# EAGLE board SPI3_projet (EAGLE 7.6.0)

Size 73.58 x 63.39 mm. Coordinates in mm from the lower left corner, seen from the top.
Outline: 0,0 56.82,0 56.82,53.33 0,53.33 0,0
Copper layers (1*16): Top 0.035mm / dielectric 1.5mm / Bottom 0.035mm
Design rules "default": minimum track width 10mil, minimum drill 24mil, track to track 8mil, track to pad 8mil, pad to pad 8mil, via to via 8mil, smd to smd 8mil, copper to edge 40mil, drill to drill 8mil, minimum pad ring 10mil, minimum via ring 8mil, stop-mask expansion 4mil, vias tented up to drill 0mil, thermal gap 10mil

## Footprints (pad centres in the part's own frame; a part is rotated, then mirrored left to right if it is on the bottom)
CR2032H = drill 1.118 pad 2.54 octagon: + 5.08,10.795; +@1 -5.08,10.795; - 0,-6.985
LED5MM = drill 0.813 octagon: A -1.27,0; K 1.27,0
2P-2.54-65/35MIL = drill 0.889 pad 1.651 square: 1 0,1.27 | drill 0.889 pad 1.651: 2 0,-1.27
PIEZO-22MM = drill 1 pad 2.54: P$1 -5,0; P$2 5,0
0207/10 = drill 0.813 octagon: 1 -5.08,0; 2 5.08,0
PHOTORESISTOR-2.54 = drill 1 pad 1.5: P$1 -1.27,0; P$2 1.27,0
B25V = drill 0.813 long: A 2.54,0.635; E -2.54,0.635; S 0,0.635
TL1105 = drill 1 pad 1.676: 1 -2.25,3.25; 2 2.25,3.25; 3 -2.25,-3.25; 4 2.25,-3.25
ARDUINO_UNO = drill 1.016 pad 1.88: 0 63.5,50.8; 1 60.96,50.8; 2 58.42,50.8; 3 55.88,50.8; 3.3V 35.56,2.54; 4 53.34,50.8; 5 50.8,50.8; 5V 38.1,2.54; 6 48.26,50.8; 7 45.72,50.8; 8 41.656,50.8; 9 39.116,50.8; 10 36.576,50.8; 11 34.036,50.8; 12 31.496,50.8; 13 28.956,50.8; A0 50.8,2.54; A1 53.34,2.54; A2 55.88,2.54; A3 58.42,2.54; A4 60.96,2.54; A5 63.5,2.54; AREF 23.876,50.8; GND 26.416,50.8; GND. 43.18,2.54; GND.. 40.64,2.54; I/OREF 30.48,2.54; N/C 27.94,2.54; RESET 33.02,2.54; SCL 18.796,50.8; SDA 21.336,50.8; VIN 45.72,2.54 | hole 3.2: 66.04,7.62; 66.04,35.56; 15.24,50.8; 13.97,2.54
DIL16 = drill 0.813 long: 1 -8.89,-3.81; 2 -6.35,-3.81; 3 -3.81,-3.81; 4 -1.27,-3.81; 5 1.27,-3.81; 6 3.81,-3.81; 7 6.35,-3.81; 8 8.89,-3.81; 9 8.89,3.81; 10 6.35,3.81; 11 3.81,3.81; 12 1.27,3.81; 13 -1.27,3.81; 14 -3.81,3.81; 15 -6.35,3.81; 16 -8.89,3.81
1X16P-2.54-2.54-11.6-3.0-BLACK-MALE = drill 0.889 pad 1.651 square: 1 0,19.05 | drill 0.889 pad 1.651: 2 0,16.51; 3 0,13.97; 4 0,11.43; 5 0,8.89; 6 0,6.35; 7 0,3.81; 8 0,1.27; 9 0,-1.27; 10 0,-3.81; 11 0,-6.35; 12 0,-8.89; 13 0,-11.43; 14 0,-13.97; 15 0,-16.51; 16 0,-19.05

## Placement (x,y rotation side)
BAT1  [CR2032H]  5,302.18 0 top  (outside the outline)
D1  [LED5MM]  5,111.68 0 top  (outside the outline)
D2  [LED5MM]  5,137.08 0 top  (outside the outline)
D3  [LED5MM]  5,149.78 0 top  (outside the outline)
D4  [LED5MM]  5,124.38 0 top  (outside the outline)
M1  [2P-2.54-65/35MIL]  5,35.48 0 top
P1  5V  [2P-2.54-65/35MIL]  5,238.68 0 top  (outside the outline)
PIEZO1  [PIEZO-22MM]  5,162.48 0 top  (outside the outline)
R1  1k‎Ω  [0207/10]  5,251.38 0 top  (outside the outline)
R2  [PHOTORESISTOR-2.54]  5,22.78 0 top
R3  [PHOTORESISTOR-2.54]  5,213.28 0 top  (outside the outline)
R4  220‎Ω  [0207/10]  5,48.18 0 top
R5  220‎Ω  [0207/10]  5,60.88 0 top
R6  220‎Ω  [0207/10]  5,73.58 0 top  (outside the outline)
R7  1k‎Ω  [0207/10]  5,187.88 0 top  (outside the outline)
R8  1k‎Ω  [0207/10]  5,200.58 0 top  (outside the outline)
R9  2k‎Ω  [0207/10]  5,225.98 0 top  (outside the outline)
R10  1k‎Ω  [0207/10]  5,264.08 0 top  (outside the outline)
R11  1k‎Ω  [0207/10]  5,289.48 0 top  (outside the outline)
Rpot1  250k‎Ω  [B25V]  5,86.28 0 top  (outside the outline)
S1  [TL1105]  5,276.78 0 top  (outside the outline)
U1  [ARDUINO_UNO]  5,10.08 0 top
U2  [DIL16]  5,98.98 0 top  (outside the outline)
U3  [1X16P-2.54-2.54-11.6-3.0-BLACK-MALE]  5,175.18 0 top  (outside the outline)

## Library data of the parts
BAT1 D1-D4 M1 P1 PIEZO1 R1-R11 Rpot1 S1 U1-U3 = AUTODESK_CIRCUITS_BREADBOARD

## Nets
N$1: R4.2 U1.4
N$2: D3.A R4.1
N$3: R5.2 U1.3
N$4: R6.2 U1.2
N$5: D4.A R6.1
N$6: Rpot1.S U1.A0
N$7: S1.2
N$8: S1.1
N$9: S1.3 U1.13
N$10: D2.A R5.1
N$11: PIEZO1.P$2 U1.6
N$12: R9.1 U3.3
N$13: U1.7 U3.4
N$14: U1.8 U3.6
N$15: U3.9
N$16: U3.10
N$17: U1.9 U3.11
N$18: U1.10 U3.12
N$19: U1.11 U3.13
N$20: U3.7
N$21: U3.8
N$22: U1.12 U3.14
N$23: R3.P$2 R7.2 U1.A1
N$24: R2.P$2 R8.2 U1.A2
N$25: D2.K D3.K D4.K P1.1 PIEZO1.P$1 R7.1 R8.1 R9.2 Rpot1.A U1.GND U2.10 U2.13 U3.1 U3.5 U3.16
N$26: R10.1 U2.9
N$27: R1.1 U3.15
N$28: U1.5
N$29: U2.1
N$30: U2.2
N$31: U2.3
N$32: U2.4
N$33: U2.5
N$34: U2.6
N$35: U2.7
N$36: P1.2 R11.1 U2.8
N$37: M1.1 U2.11
N$38: U2.12
N$39: M1.2 U2.14
N$40: R1.2 R2.P$1 R3.P$1 R10.2 Rpot1.E S1.4 U1.5V U2.15 U2.16 U3.2
N$41: R11.2
N$42: BAT1.+ BAT1.+@1 D1.A
N$43: BAT1.- D1.K

## Tracks (layer width: path | path; a pad name or v marks a point on that pad's centre or on a via)
N$1  (1 unrouted)
N$2  (1 unrouted)
N$3  (1 unrouted)
N$4  (1 unrouted)
N$5  (1 unrouted)
N$6  (1 unrouted)
N$9  (1 unrouted)
N$10  (1 unrouted)
N$11  (1 unrouted)
N$12  (1 unrouted)
N$13  (1 unrouted)
N$14  (1 unrouted)
N$17  (1 unrouted)
N$18  (1 unrouted)
N$19  (1 unrouted)
N$22  (1 unrouted)
N$23  (2 unrouted)
N$24  (2 unrouted)
N$25  (14 unrouted)
N$26  (1 unrouted)
N$27  (1 unrouted)
N$36  (2 unrouted)
N$37  (1 unrouted)
N$39  (1 unrouted)
N$40  (9 unrouted)
N$42  (2 unrouted)
N$43  (1 unrouted)